# EAGLE board MAYO 1U PANEL (EAGLE 7.7.0)
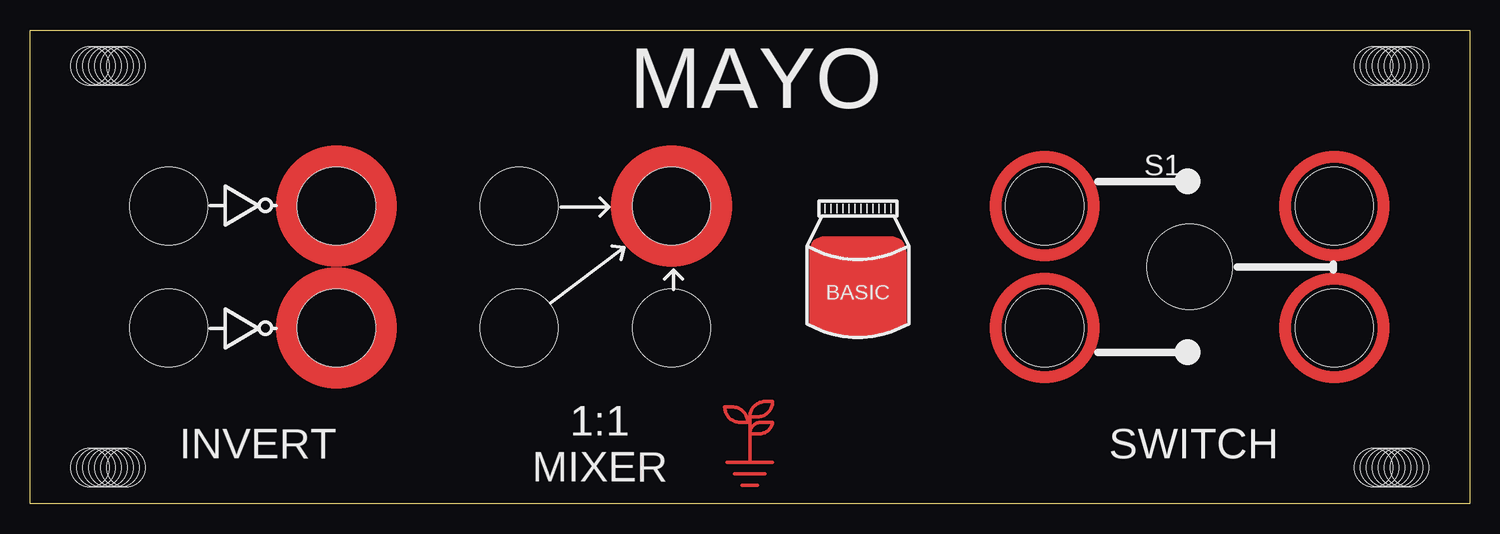
[diagram p0: board, top side]
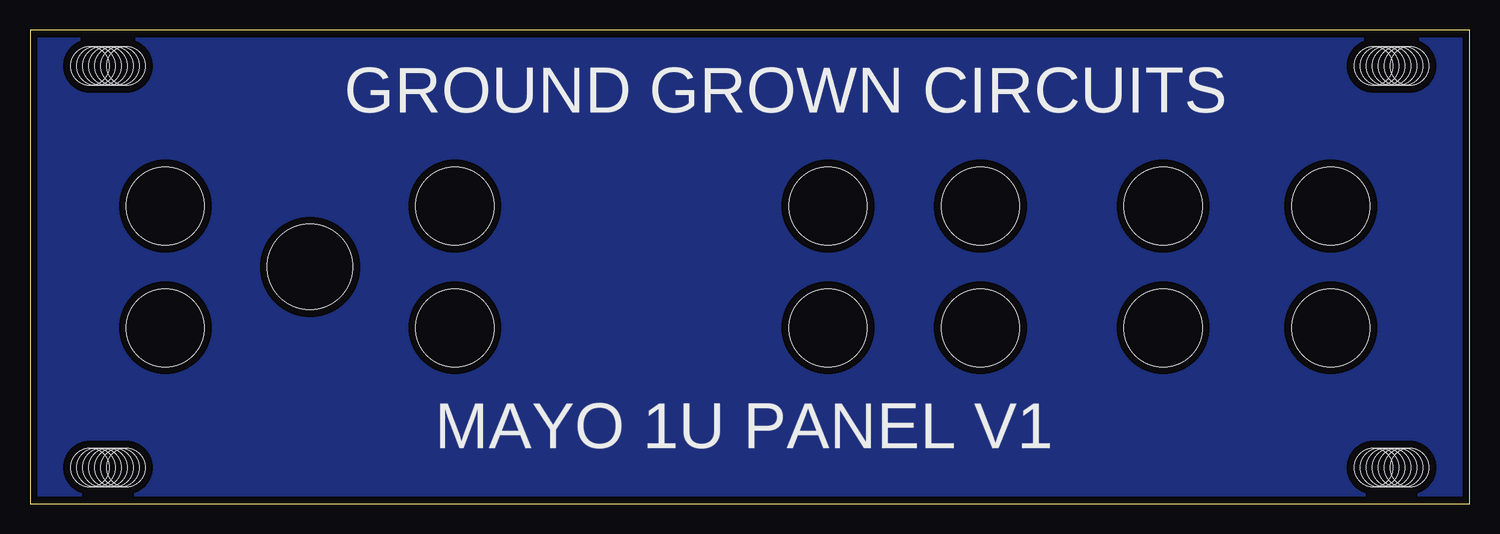
[diagram p1: board, bottom side, seen from below]

Size 120 x 39.5 mm. Coordinates in mm from the lower left corner, seen from the top.
Outline: 0,0 0,39.5 120,39.5 120,0 0,0
Copper layers (1*16): Top 0.035mm / dielectric 1.5mm / Bottom 0.035mm
Design rules "SparkFun": minimum track width 8mil, minimum drill 20mil, track to track 8mil, track to pad 8mil, pad to pad 8mil, via to via 8mil, smd to smd 8mil, copper to edge 8mil, drill to drill 8mil, minimum pad ring 12mil, minimum via ring 10mil, stop-mask expansion 4mil, vias tented up to drill 20mil, thermal gap 10mil

## Footprints (pad centres in the part's own frame; a part is rotated, then mirrored left to right if it is on the bottom)
MOUNT_DRILL = hole 3.2: 3,8; 3,7.5; 3,7; 3,6.5; 3,6; 3,5.5; 3,5
JACK_DRILL = hole 6.5: 0,0
JACK_DRILL_COPPER_SM = hole 6.5: 0,0
SWITCH_DRILL = hole 7.112: 0,0
JACK_DRILL_COPPER_EXS = hole 6.5: 0,0

## Placement (x,y rotation side)
E$1  [MOUNT_DRILL]  0,39.5 270 top
E$2  [MOUNT_DRILL]  120,39.5 270 bottom
E$3  [MOUNT_DRILL]  120,0 90 top
E$4  [MOUNT_DRILL]  0,0 90 bottom
E$5  [LOGO_SMALL_COPPER]  60,3.5 0 top
E$17  [MAYO]  69,20 0 top
IN1M  WQP-PJ301M-12_JACK  [JACK_DRILL]  40.78,14.65 270 top
IN1V  WQP-PJ301M-12_JACK  [JACK_DRILL]  11.57,14.65 90 top
IN2M  WQP-PJ301M-12_JACK  [JACK_DRILL]  40.78,24.81 270 top
IN2V  WQP-PJ301M-12_JACK  [JACK_DRILL]  11.57,24.81 90 top
IN3M  WQP-PJ301M-12_JACK  [JACK_DRILL]  53.48,14.65 90 top
MIX  WQP-PJ301M-12_JACK  [JACK_DRILL_COPPER_SM]  53.48,24.81 90 top
OUTV1  WQP-PJ301M-12_JACK  [JACK_DRILL_COPPER_SM]  25.54,14.65 90 top
OUTV2  WQP-PJ301M-12_JACK  [JACK_DRILL_COPPER_SM]  25.54,24.81 90 top
S1  [SWITCH_DRILL]  96.66,19.73 0 top
SB  WQP-PJ301M-12_JACK  [JACK_DRILL_COPPER_EXS]  84.59,24.81 270 top
ST  WQP-PJ301M-12_JACK  [JACK_DRILL_COPPER_EXS]  84.59,14.65 270 top
SW  WQP-PJ301M-12_JACK  [JACK_DRILL_COPPER_EXS]  108.72,14.65 270 top
SW1  WQP-PJ301M-12_JACK  [JACK_DRILL_COPPER_EXS]  108.72,24.81 270 top

## Library data of the parts
E$1-E$5 E$17 IN1M IN1V IN2M IN2V IN3M MIX OUTV1 OUTV2 S1 SB ST SW SW1 = GroundGrownCircuits

## Tracks (layer width: path | path; a pad name or v marks a point on that pad's centre or on a via)
S$1
  pour Bottom (isolate 0.61): 0,0 120,0 120,39.5 0,39.5

## Text on the board
tPlace: MAYO | INVERT | 1:1 / MIXER | SWITCH
bPlace: GROUND GROWN CIRCUITS | MAYO 1U PANEL V1